# EAGLE board amplivias (EAGLE 6.5.0)
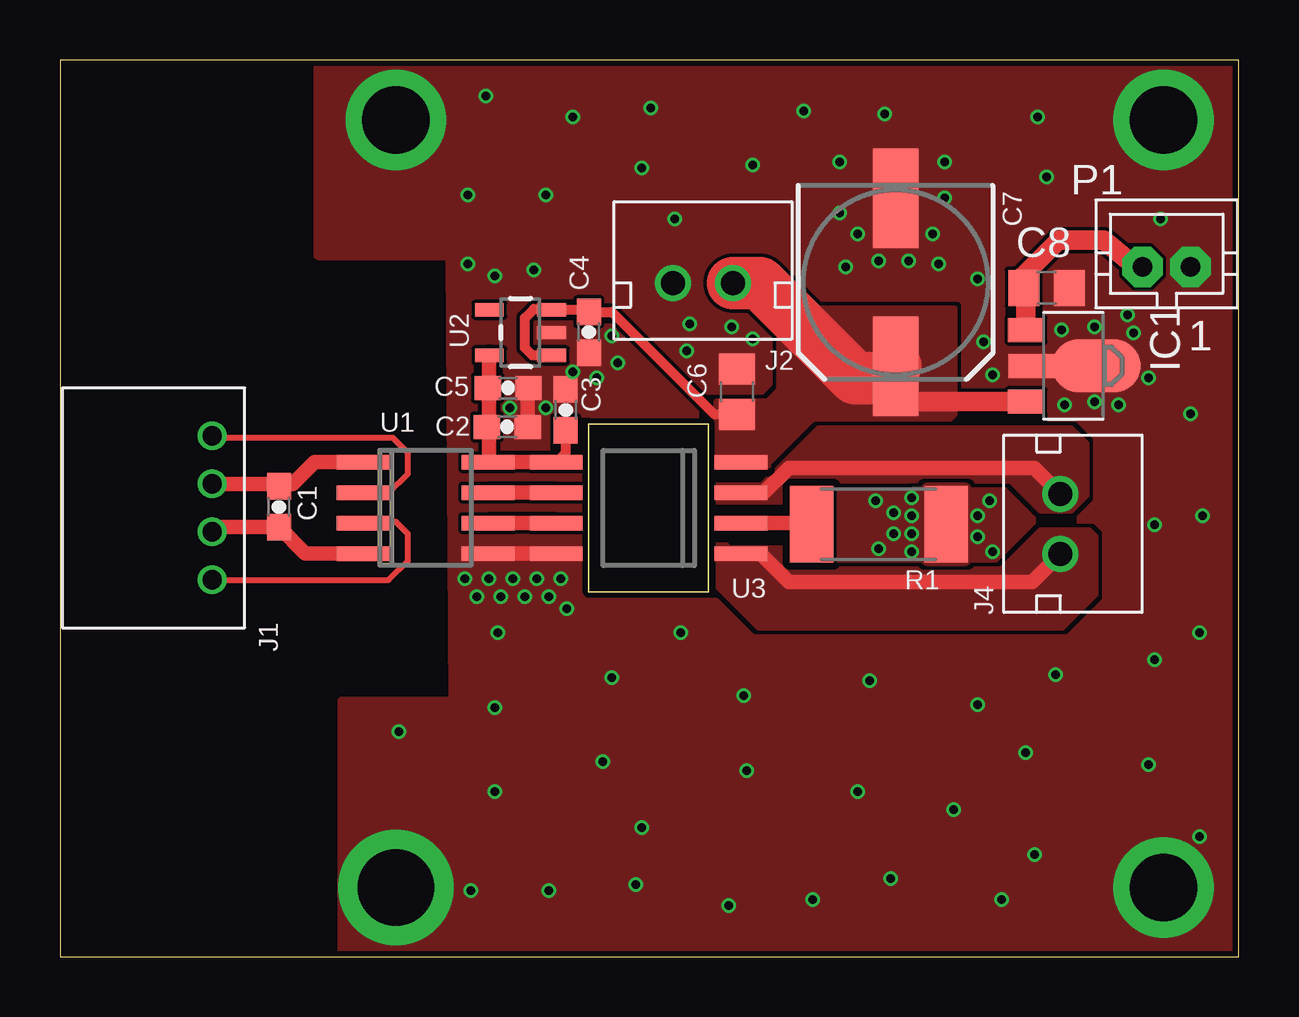
[diagram p0: board, top side]
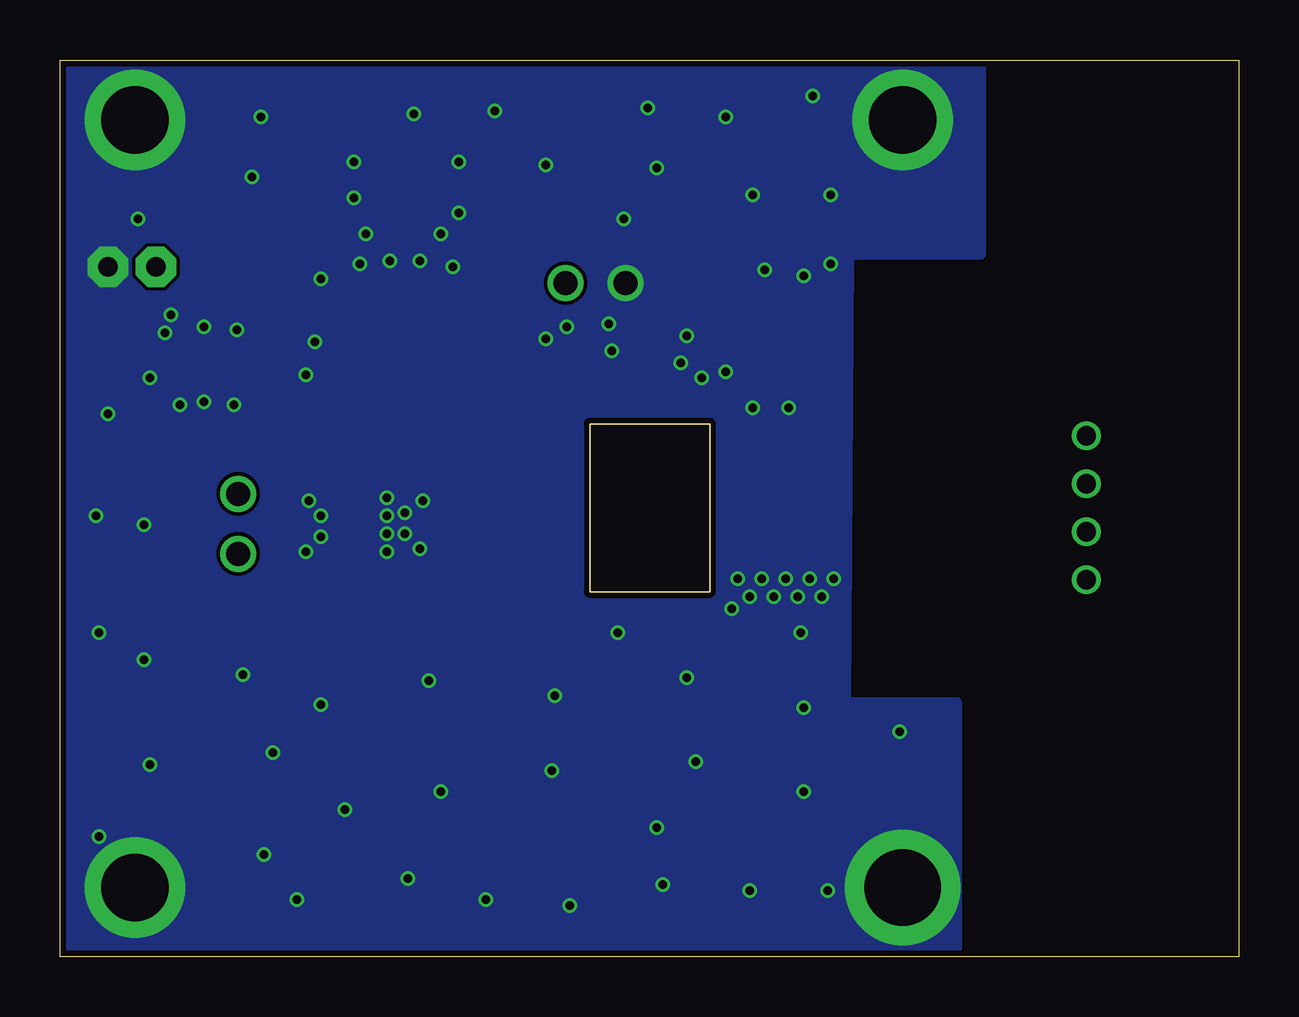
[diagram p1: board, bottom side, seen from below]

Size 49.12 x 37.38 mm. Coordinates in mm from the lower left corner, seen from the top.
Outline: 0,0 49.12,0 49.12,37.38 0,37.38 0,0
Copper layers (1*16): Top 0.018mm / dielectric 1.55mm / Bottom 0.018mm
Design rules "eC_2Layer_PClass6_BaseCopperO18_eCDefault": minimum track width 0.15mm, minimum drill 0.35mm, track to track 0.15mm, track to pad 0.15mm, pad to pad 0.15mm, via to via 0.15mm, smd to smd 0mil, copper to edge 0.25mm, drill to drill 0.35mm, minimum pad ring 0.175mm, minimum via ring 0.125mm, stop-mask expansion 0mil, vias tented up to drill 0.45mm, thermal gap 0.2mm

## Footprints (pad centres in the part's own frame; a part is rotated, then mirrored left to right if it is on the bottom)
0603-CAP = smd 1.1 x 1: 1 -0.85,0; 2 0.85,0
C0805 = smd 1.3 x 1.5: 1 -0.95,0; 2 0.95,0
SANYO-OSCON_SMD_E7 = smd 4.15 x 1.9: + 3.5,0; - -3.5,0
SOT89 = smd 1 x 1.5: 1 -1.499,-1.981; 3 1.499,-1.981 | smd 1 x 2: 2 0,-1.727 | smd 2.2 x 3.7: 2@1 0,0.94
JST-S4B-PH = drill 0.8: P$1 -3,0; P$2 -1,0; P$3 1,0; P$4 3,0
JST-XHA-2 = drill 1: P$1 -1.25,0; P$2 1.25,0
JST-PH2 = drill 0.813 pad 1.676 octagon: 1 1,0; 2 -1,0
R2512 = smd 1.8 x 3.2: 1 -2.8,0; 2 2.8,0
SO-08 = smd 0.6 x 2.2: 1 -1.905,-2.6; 2 -0.635,-2.6; 3 0.635,-2.6; 4 1.905,-2.6; 5 1.905,2.6; 6 0.635,2.6; 7 -0.635,2.6; 8 -1.905,2.6
SOT23-5 = smd 0.55 x 1.2: 1 -0.95,-1.3; 2 0,-1.3; 3 0.95,-1.3; 4 0.95,1.3; 5 -0.95,1.3
SOIC8THROUG = smd 0.6 x 2.2: P1 -1.905,3.85; P2 -0.635,3.85; P3 0.635,3.85; P4 1.905,3.85; P5 1.905,-3.85; P6 0.635,-3.85; P7 -0.635,-3.85; P8 -1.905,-3.85

## Placement (x,y rotation side)
C1  100n  [0603-CAP]  9.12,18.75 270 top
C2  100n  [0603-CAP]  18.64,22.08 0 top
C3  100n  [0603-CAP]  21.08,22.79 270 top
C4  1u  [0603-CAP]  22.05,26.02 90 top
C5  1u  [0603-CAP]  18.68,23.7 180 top
C6  220n  [C0805]  28.21,23.54 90 top
C7  [SANYO-OSCON_SMD_E7]  34.83,28.11 270 top
C8  10u  [C0805]  41.12,27.88 0 top
IC1  78L12F  [SOT89]  42.25,24.62 270 top
J1  JST-S4B-PH  [JST-S4B-PH]  6.35,18.7 90 top
J2  JST-XHA-2  [JST-XHA-2]  26.8,28.07 180 top
J4  JST-XHA-2  [JST-XHA-2]  41.7,18.04 90 top
P1  [JST-PH2]  46.12,28.75 0 top
R1  0.25  [R2512]  34.13,18.02 180 top
U1  SI8420  [SO-08]  15.24,18.7 270 top
U2  LP2985-5.0  [SOT23-5]  19.2,26.01 90 top
U3  A4950  [SOIC8THROUG]  24.54,18.7 90 top

## Library data of the parts
C1-C5 = SparkFun-Capacitors
C6-C8 = rcl
IC1 = linear
J1 P1 = jst-ph
J2 J4 = TEORA
R1 = SparkFun-Resistors
U1 U3 = lsel2014
U2 = SparkFun-PowerIC; PROD_ID: VREG-00823

## Nets
GND: C2.2 C3.1 C4.1 C5.1 C6.2 C7.- C8.2 IC1.2 IC1.2@1 J2.P$2 P1.1 R1.1 U1.5 U2.2 U3.P1
N$1: C1.2 J1.P$2 U1.4
N$2: J1.P$1 U1.3
N$3: C1.1 J1.P$3 U1.1
N$4: J1.P$4 U1.2
N$5: R1.2 U3.P7
N$6: U1.7 U3.P3
N$7: U1.6 U3.P2
N$8: C8.1 IC1.1 P1.2
N$9: J4.P$1 U3.P8
N$10: J4.P$2 U3.P6
VBAT: C4.2 C6.1 C7.+ IC1.3 J2.P$1 U2.1 U2.3 U3.P5
VDD2: C2.1 C3.2 C5.2 U1.8 U2.5 U3.P4

## Tracks (layer width: path | path; a pad name or v marks a point on that pad's centre or on a via)
GND  (via drill 0.35, 2.8, 3.2)
  Top 0.61: C2.2 19.5,23.66 C5.1 | U3.P1 U1.5
  other vias: 27.88,2.12 35.5,19.12 35.5,18.38 35.5,17.62 35.5,16.88 34,19 34.75,18.5 34.75,17.62 34.12,17 38.75,19 38.25,18.38 38.25,17.5 38.88,16.88 21.38,24.38 23,25.88 22.38,24.12 20.25,22.88 18.75,22.88 23.25,24.75 24.25,32.88 17,28.88 17,31.75 31,35.25 19.75,28.62 18.12,28.38 24.62,35.38 40.75,35 25.62,30.75 26.25,26.38 26.12,25.25 28,26.25 28.88,33 32.5,33.12 32.5,31 32.75,28.75 36.62,28.88 36.88,31.62 36.88,33.12 41.12,32.5 41.75,26.12 38.25,28.25 45.38,24.12 44.5,26.75 45.88,30.75 34.38,35.12 47.62,18.38 45.62,18 45.62,12.38 47.5,13.5 18.25,13.5 17.12,2.75 21.12,14.5 19.88,15.75 24.25,5.38 28.5,10.88 24,3 31.38,2.38 37.25,6.12 39.25,2.38 41.5,11.75 33.75,11.5 23,11.62 47.5,5 34.62,3.25 40.62,4.25 14,2.88 46,2.88 28.88,25.75 34.12,29 35.38,29 36.38,30.12 33.25,30.12 46,34.88 20.88,15.75 18.88,15.75 17.88,15.75 16.88,15.75 20.38,15 19.38,15 18.38,15 17.38,15 14,34.88 20.25,31.75 17.75,35.88 21.38,35 41.88,23 43.12,23.12 44.12,23 43.12,26.25 44.75,26 38.88,24.25 38.5,25.62 18.12,6.88 18.12,10.38 28.62,7.75 20.38,2.75 14.12,9.38 45.38,8 40.25,8.5 33.25,6.88 22.62,8.12 25.88,13.5 38.25,10.5 47.12,22.62
  pour Top (rank 3, no thermals): 16.38,10.62 11.75,10.62 11.75,0.25 48.88,0.25 49,37.12 10.75,37.12 10.75,29.25 16.25,29.25
  pour Bottom (rank 3, no thermals): 16.38,10.62 11.75,10.62 11.75,0.25 48.88,0.25 49,37.12 10.75,37.12 10.75,29.25 16.25,29.25
N$1
  Top 0.61: U1.4 10.22,16.8 C1.2 6.54,17.9 J1.P$2
N$2
  Top 0.254: J1.P$1 13.71,15.71 14.5,16.5 14.5,17.62 14,18.12 12.7,18.12 U1.3
N$3
  Top 0.254: 9.71,19.7 9.23,19.7 C1.1
  Top 0.61: J1.P$3 9.71,19.7 10.61,20.61 U1.1
N$4
  Top 0.254: U1.2 13.71,19.34 14.5,20.12 14.5,21 13.88,21.62 6.43,21.62 J1.P$4
N$5
  Top 0.61: U3.P7 31.42,18.07 R1.2
N$6
  Top 0.61: U3.P3 U1.7
N$7
  Top 0.61: U3.P2 U1.6
N$8
  Top 0.813: IC1.1 40.27,27.78 C8.1 40.12,27.93 40.12,28.38 41.62,29.88 43.5,29.88 45,28.62 P1.2
N$9
  Top 0.61: U3.P8 29.2,16.8 30.38,15.62 40.53,15.62 J4.P$1
  pour Top (isolate 0.3, no thermals): 27.38,17.12 27.38,15.5 29.12,13.75 41.75,13.75 43.12,15.12 43.12,17.5 42.88,17.75 40.88,17.75 39.25,16.12 32.38,16.12 31.62,17 27.88,17 27.75,17.12
N$10
  Top 0.61: U3.P6 29.34,19.34 30.38,20.38 40.62,20.38 J4.P$2
  pour Top (isolate 0.3, no thermals): 40.88,18.62 42.12,18.62 42.75,19.25 42.75,21.38 42.12,22 31.62,22 29.25,19.62 27.25,19.62 27.25,19.12 27.12,19 31.75,19 arc90 32.38,19.88 39.62,19.88
VBAT
  Top 0.406: U2.1 19.69,25.06 19.38,25.38 19.38,26.62 19.75,27 20.45,27 U2.3 21.96,26.96 C4.2 23,26.88 27.25,22.62 28.18,22.62 C6.1
  Top 0.813: IC1.3 35.35,23.13 34.35,24.12
  Top 2.184: J2.P$1 29.18,28.07 33.12,24.12 34.35,24.12 C7.+
  pour Top (rank 2, no thermals): 29.5,23.12 27.38,23.12 27.38,20.5 29.5,20.5 31.38,22.38 37,22.38 37.25,22.62 37.25,27 31.38,27 30,26.12 30,23.62
VDD2
  Top 0.406: C3.2 21.08,21 U3.P4
  Top 0.61: C5.2 17.89,23.02 U2.5 17.89,22 | 17.89,22 17.89,20.66 U1.8 U3.P4 | C2.1 17.82,22.08 17.89,22